# EAGLE board teensyAdapter.2 (EAGLE 7.4.0)
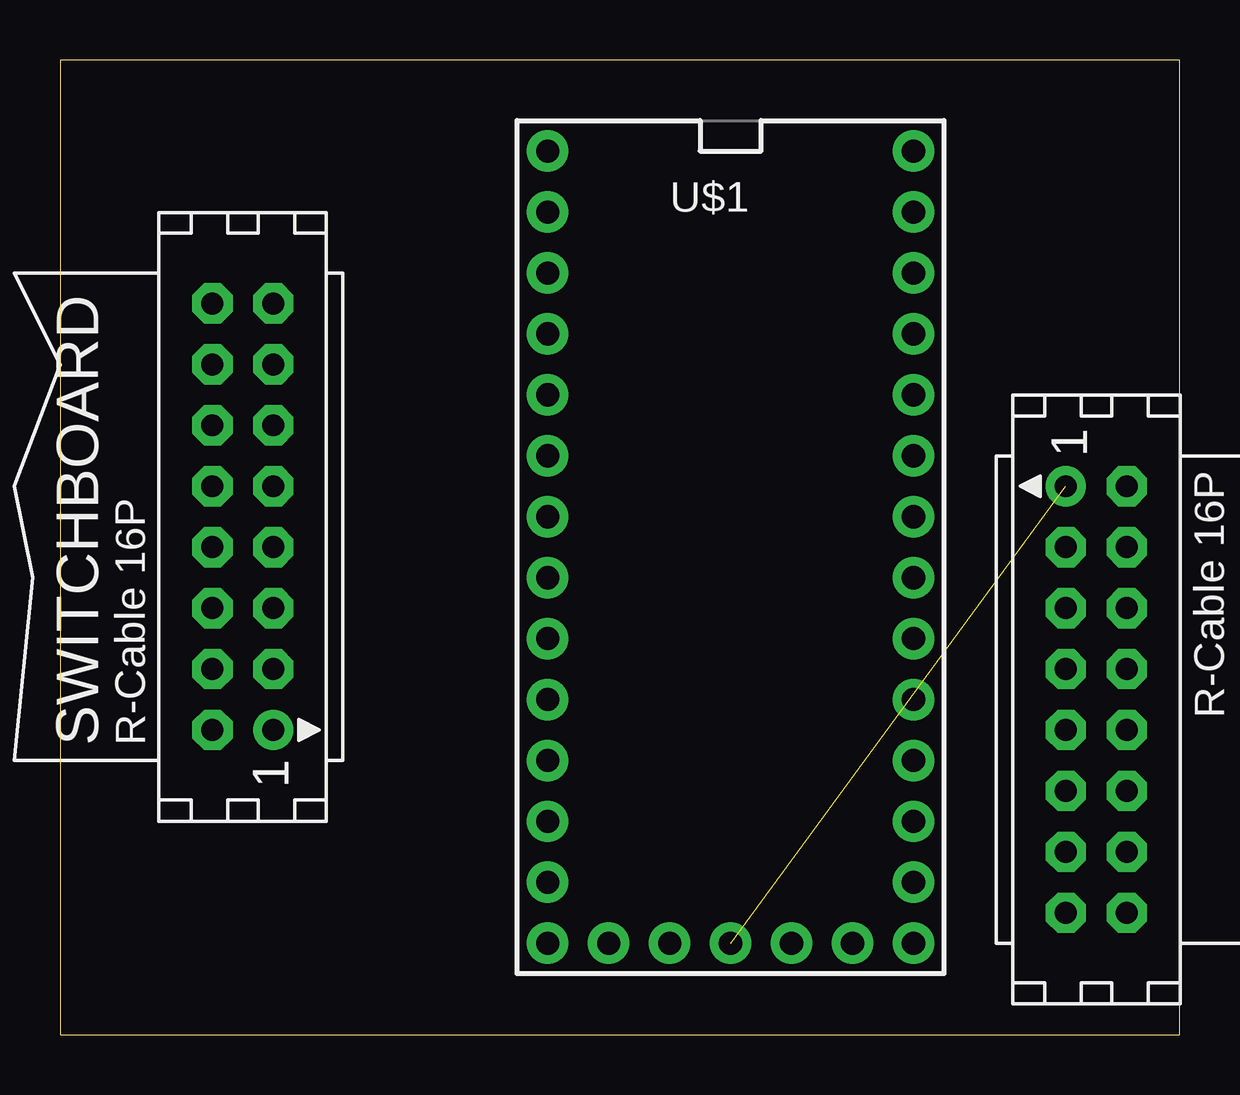
[diagram p0: board, top side]
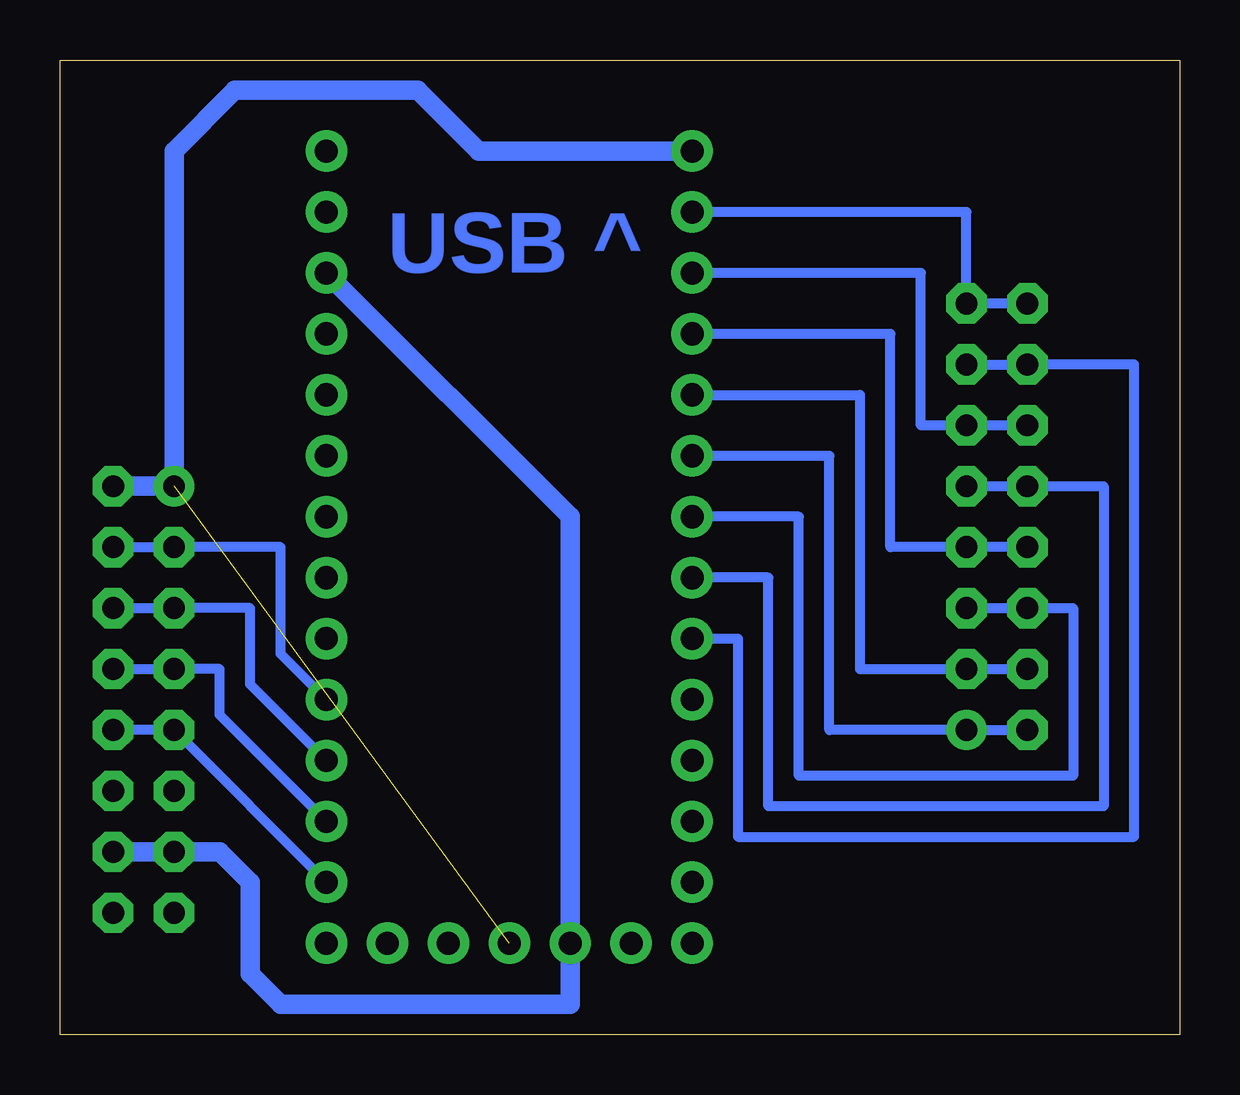
[diagram p1: board, bottom side, seen from below]

Size 46.66 x 40.63 mm. Coordinates in mm from the lower left corner, seen from the top.
Outline: 0,0 46.66,0 46.66,40.63 0,40.63 0,0
Copper layers (1*16): Top 0.035mm / dielectric 1.5mm / Bottom 0.035mm
Design rules "default *": minimum track width 15mil, minimum drill 32mil, track to track 20mil, track to pad 20mil, pad to pad 20mil, via to via 20mil, smd to smd 8mil, copper to edge 0mil, drill to drill 8mil, minimum pad ring 15mil, minimum via ring 15mil, stop-mask expansion 0mil, vias tented up to drill 0mil, thermal gap 0mil

## Footprints (pad centres in the part's own frame; a part is rotated, then mirrored left to right if it is on the bottom)
CON16 = drill 0.914: 1 -8.89,-1.27 | drill 0.914 octagon: 2 -8.89,1.27; 3 -6.35,-1.27; 4 -6.35,1.27; 5 -3.81,-1.27; 6 -3.81,1.27; 7 -1.27,-1.27; 8 -1.27,1.27; 9 1.27,-1.27; 10 1.27,1.27; 11 3.81,-1.27; 12 3.81,1.27; 13 6.35,-1.27; 14 6.35,1.27; 15 8.89,-1.27; 16 8.89,1.27
TEENSY3-OUTER_ROW = drill 0.965: 0 -7.62,13.97; 1 -7.62,11.43; 2 -7.62,8.89; 3 -7.62,6.35; 3.3V 7.62,11.43; 3.3V1 -2.54,-16.51; 4 -7.62,3.81; 5 -7.62,1.27; 6 -7.62,-1.27; 7 -7.62,-3.81; 8 -7.62,-6.35; 9 -7.62,-8.89; 10 -7.62,-11.43; 11 -7.62,-13.97; 12 -7.62,-16.51; 13 7.62,-16.51; 14/A0 7.62,-13.97; 15/A1 7.62,-11.43; 16/A2 7.62,-8.89; 17/A3 7.62,-6.35; 18/A4 7.62,-3.81; 19/A5 7.62,-1.27; 20/A6 7.62,1.27; 21/A7 7.62,3.81; 22/A8 7.62,6.35; 23/A9 7.62,8.89; AGND 7.62,13.97; GND -7.62,16.51; GND1 0,-16.51; PGM 2.54,-16.51; RESET/DAC 5.08,-16.51; VBAT -5.08,-16.51; VIN 7.62,16.51

## Placement (x,y rotation side)
SWITCHBOARD  [CON16]  7.62,21.59 90 top
THROTTLE  [CON16]  43.18,13.97 270 top
U$1  TEENSY_3.1_OUTER_ROW  [TEENSY3-OUTER_ROW]  27.94,20.32 0 top

## Library data of the parts
SWITCHBOARD THROTTLE = con-harting; OC_FARNELL: unknown; OC_NEWARK: unknown
U$1 = Teensy_3_and_LC_Series_Boards_v1.0

## Nets
AGND: U$1.AGND
N$1: SWITCHBOARD.15 SWITCHBOARD.16 U$1.0
N$2: SWITCHBOARD.11 SWITCHBOARD.12 U$1.1
N$3: SWITCHBOARD.7 SWITCHBOARD.8 U$1.2
N$4: SWITCHBOARD.3 SWITCHBOARD.4 U$1.3
N$5: THROTTLE.13 THROTTLE.14 U$1.3.3V U$1.3.3V1
N$6: THROTTLE.1 THROTTLE.2 U$1.GND U$1.GND1
N$7: SWITCHBOARD.1 SWITCHBOARD.2 U$1.4
N$8: SWITCHBOARD.5 SWITCHBOARD.6 U$1.5
N$9: SWITCHBOARD.9 SWITCHBOARD.10 U$1.6
N$10: SWITCHBOARD.13 SWITCHBOARD.14 U$1.7
N$11: THROTTLE.9 THROTTLE.10 U$1.14/A0
N$12: THROTTLE.7 THROTTLE.8 U$1.15/A1
N$13: THROTTLE.5 THROTTLE.6 U$1.16/A2
N$14: THROTTLE.3 THROTTLE.4 U$1.17/A3
VBAT: U$1.VBAT
VIN: U$1.VIN

## Tracks (layer width: path | path; a pad name or v marks a point on that pad's centre or on a via)
N$1
  Bottom 0.406: SWITCHBOARD.16 SWITCHBOARD.15 8.89,34.29 U$1.0
N$2
  Bottom 0.406: U$1.1 10.79,31.75 10.79,25.4 SWITCHBOARD.11 SWITCHBOARD.12
N$3
  Bottom 0.406: SWITCHBOARD.8 SWITCHBOARD.7 12.06,20.32 12.06,29.21 U$1.2
N$4
  Bottom 0.406: U$1.3 13.34,26.67 13.34,15.24 SWITCHBOARD.3 SWITCHBOARD.4
N$5
  Bottom 0.813: THROTTLE.14 THROTTLE.13 40.01,7.62 38.73,6.35 38.73,2.54 37.47,1.27 25.4,1.27 U$1.3.3V1 25.4,21.59 U$1.3.3V
N$6  (1 unrouted)
  Bottom 0.813: THROTTLE.2 THROTTLE.1 41.91,36.83 39.37,39.37 31.75,39.37 29.21,36.83 U$1.GND
N$7
  Bottom 0.406: SWITCHBOARD.2 SWITCHBOARD.1 14.61,12.7 14.61,24.13 U$1.4
N$8
  Bottom 0.406: SWITCHBOARD.6 SWITCHBOARD.5 4.45,17.78 4.45,10.79 15.88,10.79 15.88,21.59 U$1.5
N$9
  Bottom 0.406: SWITCHBOARD.9 SWITCHBOARD.10 3.17,22.86 3.17,9.53 17.14,9.53 17.14,19.05 U$1.6
N$10
  Bottom 0.406: SWITCHBOARD.13 SWITCHBOARD.14 1.91,27.94 1.91,8.26 18.41,8.26 18.41,16.51 U$1.7
N$11
  Bottom 0.406: THROTTLE.10 THROTTLE.9 U$1.14/A0
N$12
  Bottom 0.406: THROTTLE.8 THROTTLE.7 40.01,15.24 40.01,13.34 U$1.15/A1
N$13
  Bottom 0.406: THROTTLE.6 THROTTLE.5 38.73,17.78 38.73,14.61 U$1.16/A2
N$14
  Bottom 0.406: THROTTLE.4 THROTTLE.3 37.47,20.32 37.47,15.88 U$1.17/A3

## Text on the board
Bottom: USB ^